# Altium PCB LPS.PcbDoc
Units mm, origin at the board's own origin, x right, y up, seen from the top; angles counter-clockwise.
Board outline 197.75 x 135.25 mm, 2 copper layers (Top Layer, Bottom Layer), stack 1.391 mm thick; 24 components, 14 nets, 72 pads, 0 vias.
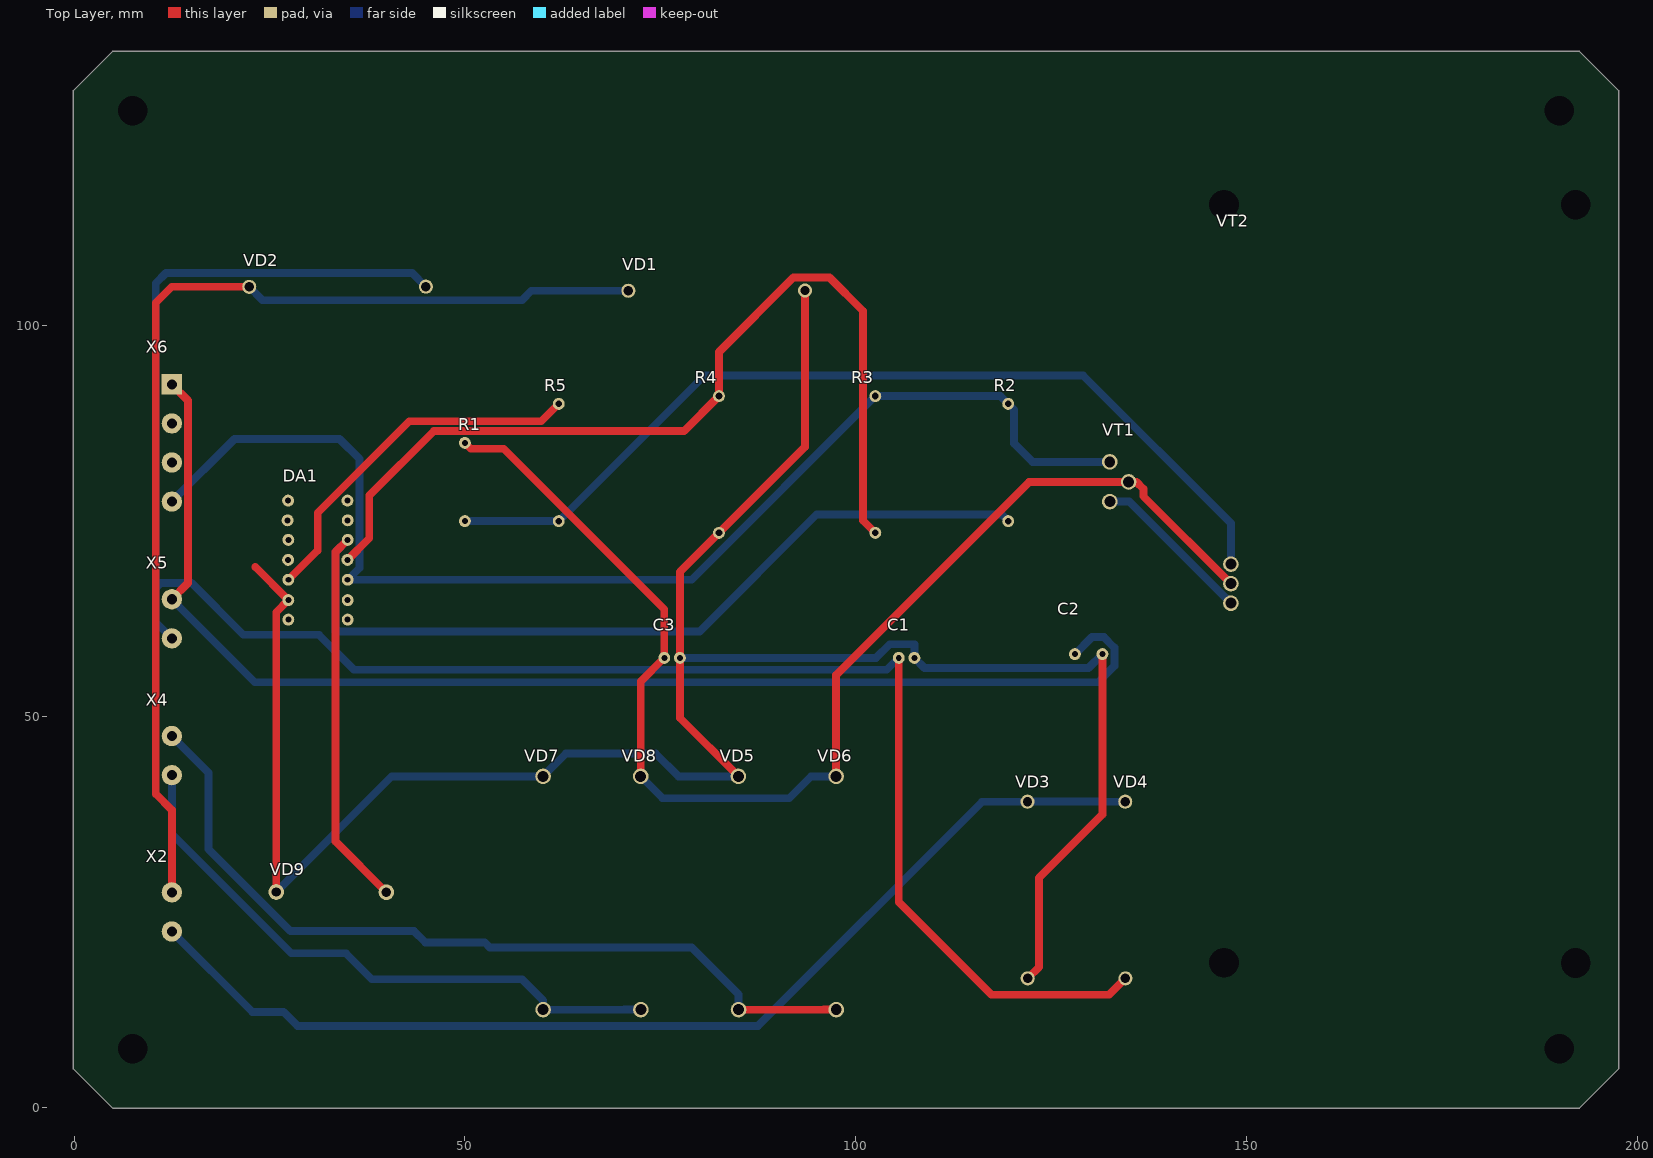
[diagram p0: Top Layer view]
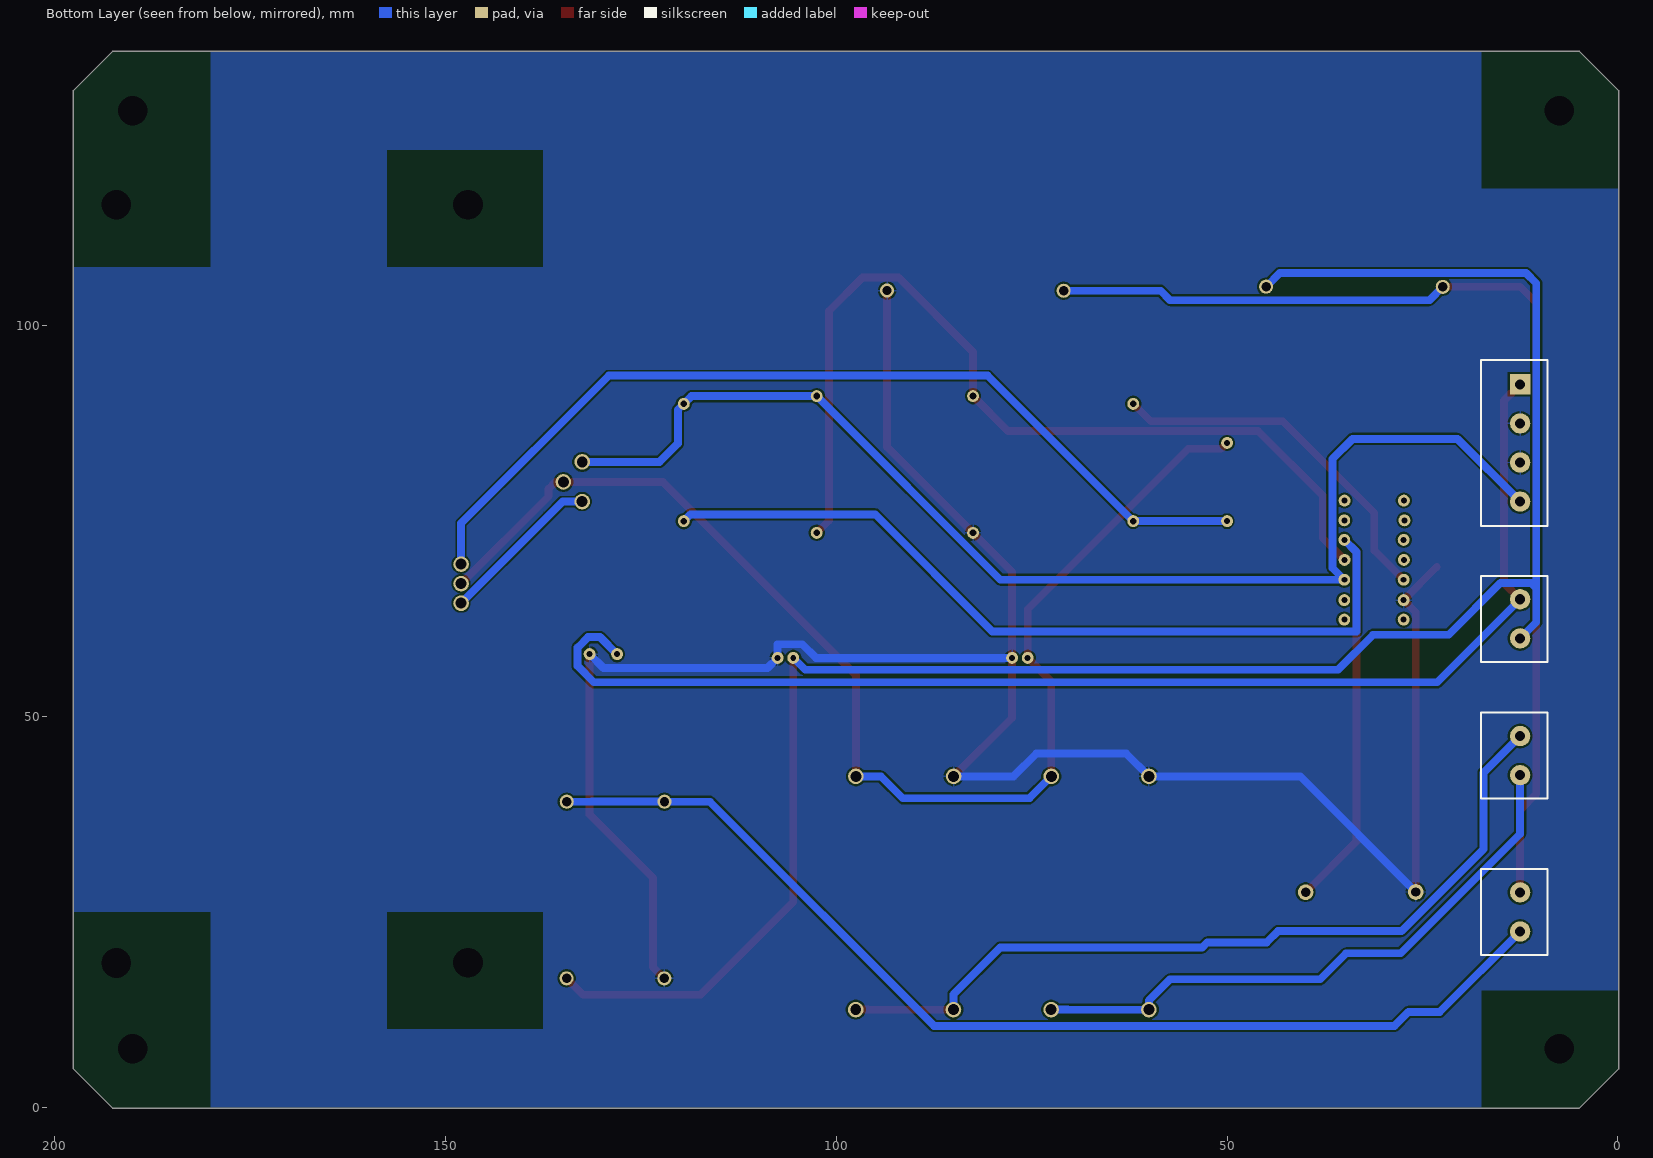
[diagram p1: Bottom Layer view, seen from below]
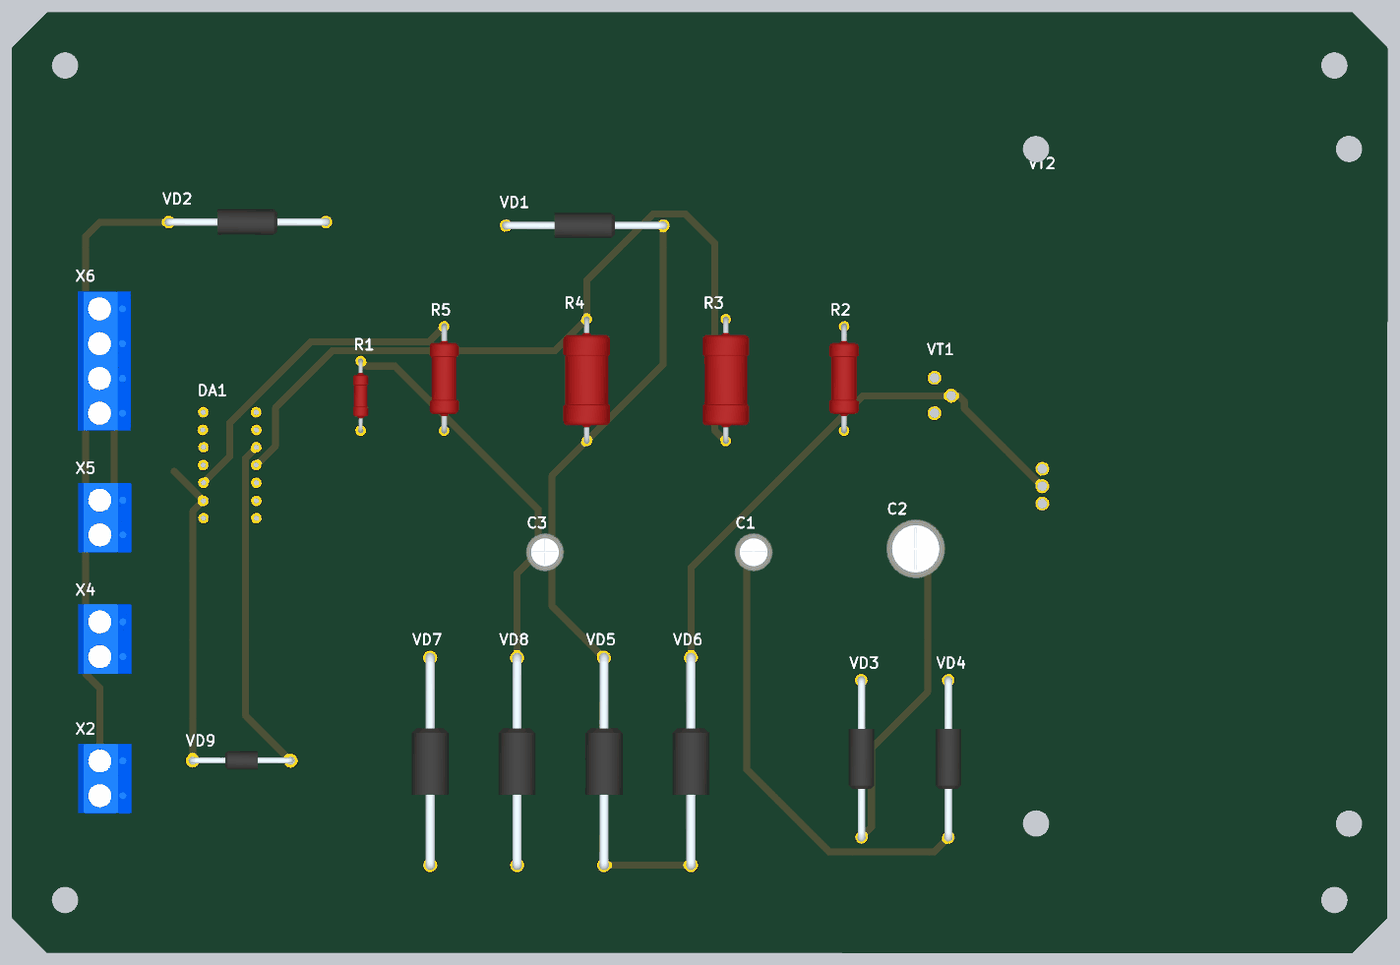
[diagram p2: 3D render of the assembled board from above, using the file's embedded part models]

## Layer stack, top to bottom
Top Solder: solder mask 0.0102, Solder Resist, Dk 3.5
Top Layer: signal copper 0.0356
Dielectric 1: dielectric 1.32, FR-4, Dk 4.8
Bottom Layer: signal copper 0.0356
Bottom Solder: solder mask 0.0102, Solder Resist, Dk 3.5

## Board outline
4.91,-0.09 -0.09,4.91 -0.127,5 -0.127,130 -0.09,130.09 4.91,135.09 5,135.127 192.5,135.127 192.59,135.09 197.59,130.09 197.627,130 197.627,5 197.627,100 197.59,4.91 192.59,-0.09 192.5,-0.127

## Design rules (kind name [scope] priority, off if disabled: settings)
Clearance [All] p1: gap=0.254 ignorepadtopadclearanceinfootprint=FALSE except(0: Arc-Hole Track-Hole SMDPad-Hole THPad-Hole Via-Hole Fill-Hole Poly-Hole Region-Hole Text-Hole)
PlaneClearance [All] p1: clearance=1
PolygonConnect [All] p1: connectstyle=Relief reliefconductorwidth=0.254 reliefentries=4 polygonreliefangle="90 Angle" airgapwidth=0.254
RoutingVias [All] p1: holewidth=0.711 width=1.27 viastyle="Through Hole" minholewidth=0.711 minwidth=1.27 maxholewidth=0.711 maxwidth=1.27
SolderMaskExpansion [All] p1: expansion=0.102 istentingtop=FALSE
Width [All] p1: maxlimit=1.5 minlimit=0.75 preferedwidth=1
29 further rules are at their usual default settings.

## Components (designator, comment, footprint, x,y, rotation, side; value= is the part's Value field where it differs from the comment)
C1 "=Value" LPS_C1 107,58 r0 top
C2 "=Value" LPS_C2 130,57.5 r0 top
C3 "=Value" LPS_C1 77,58 r0 top
DA1 "LPS_DA1" LPS_DA1 36,68.4 r90 top
R1 "=Value" LPS_R1 55,85 r0 top
R2 "=Value" LPS_R2_R5 120,82.5 r0 top
R3 "=Value" LPS_R3_R4 102.5,82.5 r0 top
R4 "=Value" LPS_R3_R4 82.5,82.5 r0 top
R5 "=Value" LPS_R2_R5 62.5,82.5 r0 top
VD1 "" LPS_VD1-VD4 82.5,102.5 r180 top
VD2 "" LPS_VD1-VD4 34,103 r180 top
VD3 "" LPS_VD1-VD4 120,27.5 r90 top
VD4 "" LPS_VD1-VD4 132.5,27.5 r90 top
VD5 "" LPS_VD5-VD8 99.986,42.345 r0 top
VD6 "" LPS_VD5-VD8 112.486,42.345 r0 top
VD7 "" LPS_VD5-VD8 74.986,42.345 r0 top
VD8 "" LPS_VD5-VD8 87.486,42.345 r0 top
VD9 "" LPS_VD9 32.5,27.5 r90 top
VT1 "" LPS_VT2 134.25,80.75 r90 top
VT2 "" LPS_VT1 150,67.5 r270 top
X2 "LPS_X2" TERMINALBLOCK_2 12.5,27.5 r0 top
X4 "LPS_X4" TERMINALBLOCK_2 12.5,47.5 r0 top
X5 "LPS_X2" TERMINALBLOCK_2 12.5,65 r0 top
X6 "LPS_port3" TerminalBlock_4 12.5,92.5 r0 top

## Footprints (in the part's own frame and the unit in brackets; to place one, negate y for a bottom-side part, rotate by r counter-clockwise, add the part's x,y. Pads: shape width x height; smd on the part's side, far side on the other; paste and mask are expansions set on the pad)
LPS_C1 [mil]
  round 60 hole 30: 1(-59.05,-19.68) 2(19.69,-19.68)
  body extent -128,-128 89,89, height 512
LPS_C2 [mil] "27ucappr-3.5_8.5h12"
  round 60 hole 30: 1(-77,19) 2(61,19)
  body extent -175,-148 159,187, height 522
LPS_DA1 [mil] "КР104УД708"
  round 60 hole 30: 1(-236.22,39.37) 2(-137.8,39.37) 3(-35.43,39.37) 4(64.31,40.55) 5(165.35,39.37) 6(263.78,39.37) 7(363.53,40.55) 8(-236.22,338.58) 9(-137.8,338.58) 10(-35.43,338.58) 11(64.31,339.76) 12(165.35,338.58) 13(263.78,342.52) 14(363.53,339.76)
  body extent -299,34 429,344, height 254
LPS_R1 [mil] "С2-33Р-0,125"
  round 60 hole 30: 1(-196.85,0) 2(-196.85,-393.7)
  body extent -240,-406 -154,12, height 106
LPS_R2_R5 [mil] "S2-33N-05"
  round 60 hole 33.94: 1(-19.69,295.28) 2(-19.69,-295.28)
  body extent -102,-311 63,311, height 185
LPS_R3_R4 [mil] "S2-33N-2"
  round 60 hole 33.94: 1(0,334.65) 2(0,-354.33)
  body extent -132,-370 132,350, height 284
LPS_VD1-VD4 [mm]
  round 1.8 hole 1.2: 1(-11,-2) 2(11.6,-1.975)
  body extent -11.55,-3.84 12.14,-0.16, height 5.61
LPS_VD5-VD8 [mm]
  round 2 hole 1.4: 1(-15,0) 2(-14.986,-29.845)
  body extent -17.66,-30.51 -12.34,0.66, height 8.91
LPS_VD9 [mm]
  round 2 hole 1.2: 1(0.05,6.65) 2(0.025,-7.45)
  body extent -1.27,-7.85 1.43,7.14, height 3.45
LPS_VT1 [mm]
  round 2 hole 1.4: 1(-2,-2) 2(0.5,-2) 3(3,-2)
  body extent -52.47,-7.39 53.53,46.61, height 90.01
LPS_VT2 [mm]
  round 2 hole 1.4: 1(-3.25,1.75) 2(-0.737,-0.66) 3(1.829,1.753)
  body extent -5.86,-1.87 4.44,2.95, height 30.89
TERMINALBLOCK_2 [mm]
  round 2.6 hole 1.3 unplated: 1(0,0) 2(0,-5)
  body extent -3.1,-7.5 4.5,2.5, height 10
TerminalBlock_4 [mm]
  rect 2.6x2.6 hole 1.3 unplated: 1(0,0)
  round 2.6 hole 1.3 unplated: 2(0,-5) 3(0,-10) 4(0,-15)
  body extent -3.15,-17.5 4.45,2.5, height 10

## Part data
C1 C3: library part LPS_C1
C2: library part LPS_C2
R1: library part LPS_R1
R2: library part LPS_R2
R3: library part LPS_R3
R4: library part LPS_R4
R5: library part LPS_R5
VD1 VD2 VD3 VD4: library part LPS_VD1
VD5 VD6 VD7 VD8: library part LPS_VD7
VD9: library part LPS_VD9
VT1: library part LPS_VT2
VT2: library part LPS_VT1

## Free pads (board coordinates)
  round 1.524 hole 3.8 unplated: 46(7.5,7.5) 46(7.5,127.5) 46(147.1,18.5) 46(147.1,115.475) 46(190,7.5) 46(190,127.5) 46(192.1,18.475) 46(192.1,115.494)

## Nets (pads, with @x,y where several pads share a name; then routed paths per layer and width w, separated by ;. In a path a pad name is that pad's centre, name@x,y a point inside that pad or via, vN(x,y) a via of type N, cw(c..) or ccw(c..) an arc to the next point about the centre after c; other vN are vias at no path point)
GND: C1.2 C2.2 C3.2 DA1.9 R4.2 VD1.1 VD3.1 VD5.1 VD7.1 VD9.1 X6.2 X6.3 | length 286.8
  Top Layer w1: 23.158,69.142 DA1.9 25.85,63.35 VD9.1 ; VD5.1 77.5,49.831 C3.2 77.5,68.5 R4.2 93.5,84.5 VD1.1 ; VD3.1 123.438,17.938 123.438,29.356 131.549,37.468 C2.2
  Bottom Layer w1: VD9.1 40.645,42.345 VD7.1 62.897,45.256 74.416,45.256 77.327,42.345 VD5.1 ; C3.2 102.585,57.5 104.337,59.252 107.5,59.252 C1.2 108.796,56.204 129.771,56.204 C2.2
NetC1_1: C1.1 VD2.1 VD4.1 X5.2 | length 248.7
  Top Layer w1: C1.1 105.5,26.262 117.367,14.395 132.395,14.395 VD4.1
  Bottom Layer w1: X5.2 10.433,62.067 10.433,66.44 ; VD2.1 43.25,106.75 11.75,106.75 10.433,105.433 10.433,66.44 ; C1.1 103.975,55.975 35.81,55.975 31.314,60.471 21.634,60.471 15.03,67.075 11.068,67.075 10.433,66.44
NetC2_1: C2.1 X5.1 X6.1 | length 163.9
  Top Layer w1: X5.1 14.573,67.073 14.573,90.427 X6.1
  Bottom Layer w1: X5.1 23.125,54.375 131.007,54.375 133.09,56.458 133.09,58.82 131.743,60.166 130.228,60.166 C2.1
NetC3_1: C3.1 R1.1 VD6.1 VD8.1 VT1.2 VT2.2 | length 163.9
  Top Layer w1: R1.1 50.736,84.264 54.966,84.264 75.5,63.73 C3.1 72.486,54.486 VD8.1 ; VD6.1 97.486,55.322 122.177,80.013 VT1.2 135.925,80.013 136.798,79.14 136.798,78.202 VT2.2
  Bottom Layer w1: VD8.1 75.29,39.541 91.484,39.541 94.288,42.345 VD6.1
NetDA1_3: DA1.3 R2.1 R3.1 VT1.3 X6.4 | length 157.7
  Bottom Layer w1: X6.4 20.515,85.515 33.953,85.515 36.519,82.95 36.519,69.019 DA1.3 79,67.5 R3.1 118.5,91 R2.1 120.263,89.237 120.263,84.931 122.615,82.579 VT1.3
NetDA1_4: DA1.4 R3.2 R4.1 | length 118.2
  Top Layer w1: DA1.4 37.763,72.827 37.763,78.276 46.003,86.516 78.016,86.516 R4.1 82.5,96.648 92.018,106.166 96.641,106.166 100.908,101.898 100.908,75.092 R3.2
NetDA1_5: DA1.5 R2.2 VD9.2 | length 153.4
  Top Layer w1: DA1.5 33.445,71.045 33.445,34.03 VD9.2
  Bottom Layer w1: DA1.5 33.445,71.045 33.445,60.884 80.036,60.884 95.015,75.863 118.637,75.863 R2.2
NetDA1_10: DA1.10 R5.1 | length 46.7
  Top Layer w1: DA1.10 31.159,71.259 31.159,76.067 42.863,87.77 59.77,87.77 R5.1
NetR1_2: R1.2 R5.2 VT2.1 | length 118.8
  Bottom Layer w1: R1.2 50.025,75.025 61.975,75.025 R5.2 80.618,93.618 129.102,93.618 148,74.72 VT2.1
NetVD1_2: VD1.2 VD2.2 X2.1 | length 138.8
  Top Layer w1: X2.1 12.5,38.033 10.433,40.1 10.433,102.933 12.475,104.975 VD2.2
  Bottom Layer w1: VD2.2 24.105,103.27 57.296,103.27 58.501,104.475 VD1.2
NetVD3_2: VD3.2 VD4.2 X2.2 | length 138.9
  Bottom Layer w1: X2.2 22.789,12.211 26.791,12.211 28.594,10.408 87.471,10.408 116.164,39.1 VD3.2 121.985,39.11 131.235,39.11 131.245,39.1 VD4.2
NetVD5_2: VD5.2 VD6.2 X4.1 | length 106.4
  Top Layer w1: VD5.2 85.01,12.49 95.904,12.49 95.914,12.5 VD6.2
  Bottom Layer w1: X4.1 17.189,42.811 17.189,33.039 27.68,22.549 43.478,22.549 44.926,21.101 52.521,21.101 53.181,20.441 79.013,20.441 85,14.454 VD5.2
NetVD7_2: VD7.2 VD8.2 X4.2 | length 77.5
  Bottom Layer w1: X4.2 12.5,34.985 27.781,19.704 34.766,19.704 38.094,16.377 57.296,16.377 60,13.673 VD7.2 60.01,12.49 70.377,12.49 70.387,12.5 VD8.2
NetVT1_1: VT1.1 VT2.3 | length 20.9
  Bottom Layer w1: VT1.1 135,77.5 VT2.3
pads on no net: DA1.1 DA1.2 DA1.6 DA1.7 DA1.8 DA1.11 DA1.12 DA1.13 DA1.14

## Polygon pours and split planes (outlines as drawn)
GND on Bottom Layer "GND_L01_P-001" (solid, remove dead copper, pour order 6): 0,117.5 17.5,117.5 17.5,135 137.5,135 137.5,0 17.5,0 17.5,15 0,15
GND on Bottom Layer "GND_L01_P-001" (solid, pour order 5): 137.5,135 180,135 180,107.5 157.5,107.5 157.5,122.5 137.5,122.5
GND on Bottom Layer "GND_L01_P-001" (solid, pour order 4): 157.5,10 157.5,25 137.5,25 137.5,107.5 197.5,107.5 197.5,25 180,25 180,10
GND on Bottom Layer "GND_L01_P-001" (solid, pour order 3): 137.5,10 180,10 180,0 137.5,0

## Silkscreen, mask and mechanical layers (free items; w line width, h text height)
Mechanical 1:
  lines w0.254: 197.5,100 197.5,5 ; 197.5,5 197.5,125 197.5,130 192.5,135 190,135 7.5,135 5,135 0,130 0,127.5 0,125 0,5 5,0 192.5,0 197.5,5